# EAGLE board Orbiter_V3_1 (EAGLE 8.6.3)
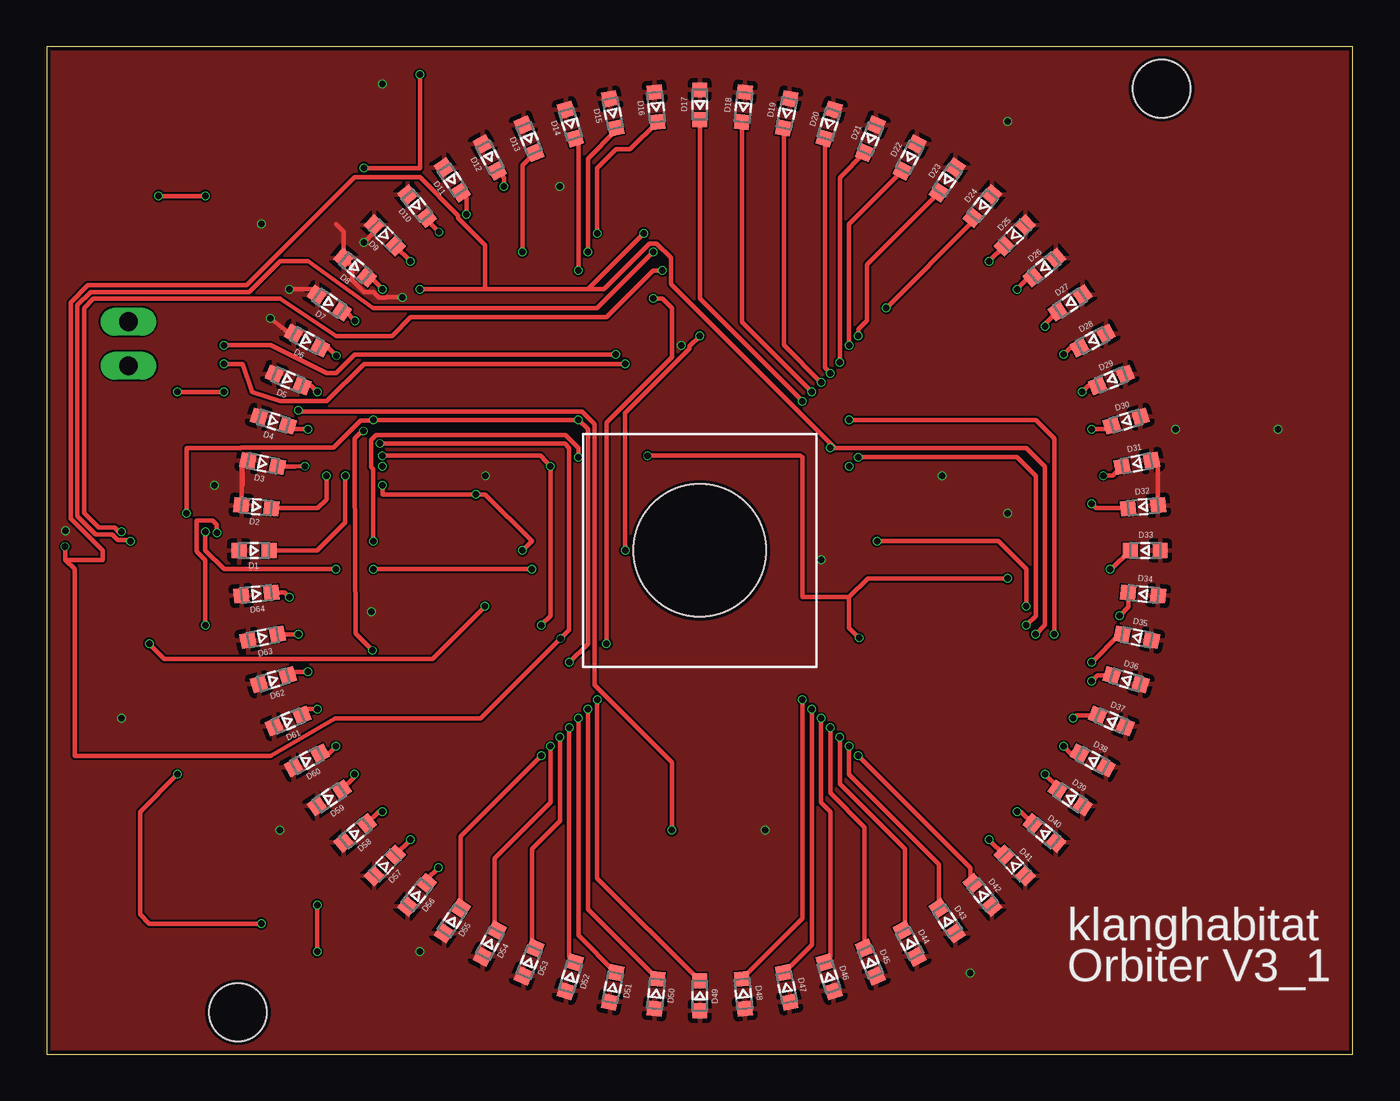
[diagram p0: board, top side]
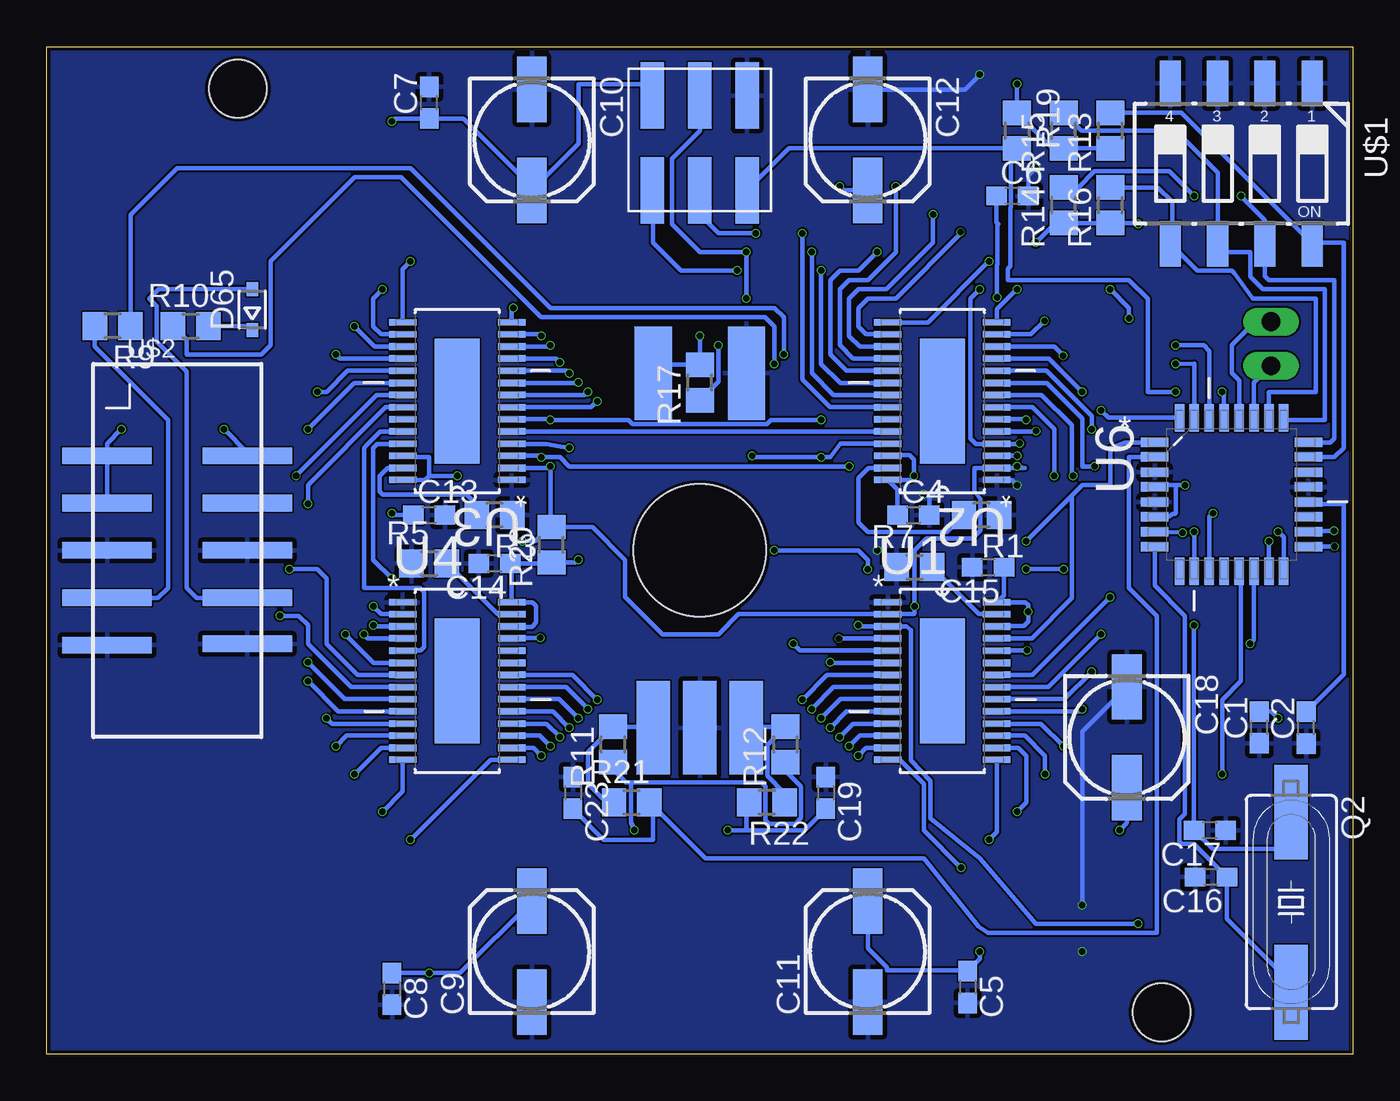
[diagram p1: board, bottom side, seen from below]

Size 70 x 54 mm. Coordinates in mm from the lower left corner, seen from the top.
Outline: 0,0 70,0 70,54 0,54 0,0
Copper layers (1*16): Top 0.035mm / dielectric 1.5mm / Bottom 0.035mm
Design rules "aisler_go_2layer": minimum track width 0.1mm, minimum drill 0.2mm, track to track 0.1mm, track to pad 0.1mm, pad to pad 0.1mm, via to via 0.1mm, smd to smd 0.1mm, copper to edge 0.2mm, drill to drill 0.21mm, minimum pad ring 0.25mm, minimum via ring 0.05mm, stop-mask expansion 0.01mm, vias tented up to drill 0mil, thermal gap 10mil
Holes 3.1 mm at 10.25,2.25 59.75,51.75

## Footprints (pad centres in the part's own frame; a part is rotated, then mirrored left to right if it is on the bottom)
THT_PIN = drill 1 long: P$1 0,0
C0603 = smd 1.1 x 1: 1 -0.85,0; 2 0.85,0
153CLV-0605 = smd 3.5 x 1.6: + 2.7,0; - -2.7,0
WL-SMCW_0603 = smd 0.8 x 0.8: 1 -0.8,0; 2 0.8,0
SOD323-R = smd 0.762 x 0.6: A 1.1,0; C -1.1,0
SM49 = smd 5.08 x 1.778: 1 -4.826,0; 2 4.826,0
R0805 = smd 1.3 x 1.5: 1 -0.95,0; 2 0.95,0
SOP65P640X120-29N = smd 1.473 x 0.356: 1 -2.921,4.216; 2 -2.921,3.581; 3 -2.921,2.921; 4 -2.921,2.286; 5 -2.921,1.626; 6 -2.921,0.965; 7 -2.921,0.33; 8 -2.921,-0.33; 9 -2.921,-0.965; 10 -2.921,-1.626; 11 -2.921,-2.286; 12 -2.921,-2.921; 13 -2.921,-3.581; 14 -2.921,-4.216; 15 2.921,-4.216; 16 2.921,-3.581; 17 2.921,-2.921; 18 2.921,-2.286; 19 2.921,-1.626; 20 2.921,-0.965; 21 2.921,-0.33; 22 2.921,0.33; 23 2.921,0.965; 24 2.921,1.626; 25 2.921,2.286; 26 2.921,2.921; 27 2.921,3.581; 28 2.921,4.216 | smd 2.4 x 6.7: THERMAL 0,0
QFP80P900X900X120-32N = smd 1.473 x 0.508: 1 -4.115,2.794; 2 -4.115,2.007; 3 -4.115,1.194; 4 -4.115,0.406; 5 -4.115,-0.406; 6 -4.115,-1.194; 7 -4.115,-2.007; 8 -4.115,-2.794; 17 4.115,-2.794; 18 4.115,-2.007; 19 4.115,-1.194; 20 4.115,-0.406; 21 4.115,0.406; 22 4.115,1.194; 23 4.115,2.007; 24 4.115,2.794 | smd 0.508 x 1.473: 9 -2.794,-4.115; 10 -2.007,-4.115; 11 -1.194,-4.115; 12 -0.406,-4.115; 13 0.406,-4.115; 14 1.194,-4.115; 15 2.007,-4.115; 16 2.794,-4.115; 25 2.794,4.115; 26 2.007,4.115; 27 1.194,4.115; 28 0.406,4.115; 29 -0.406,4.115; 30 -1.194,4.115; 31 -2.007,4.115; 32 -2.794,4.115
CTS-219-04 = smd 1.13 x 2.44: 1 -3.81,-4.3; 2 -1.27,-4.3; 3 1.27,-4.3; 4 3.81,-4.3; 5 3.81,4.3; 6 1.27,4.3; 7 -1.27,4.3; 8 -3.81,4.3
87832-10 = smd 0.89 x 4.8: 1 -5.08,-3.759; 2 -5.08,3.757; 3 -2.54,-3.759; 4 -2.54,3.757; 5 0,-3.759; 6 0,3.757; 7 2.54,-3.759; 8 2.54,3.757; 9 5.08,-3.759; 10 5,3.757
6PIN_HEADER_SMD_OPEN = smd 1.27 x 3.56: 1 -2.54,-2.7; 2 -2.54,2.38; 3 0,-2.7; 4 0,2.38; 5 2.54,-2.7; 6 2.54,2.38
BOURNS_ENCODER_SMD = smd 2 x 5 bottom: S1 -2.5,9.5; S2 2.5,9.5 | smd 1.8 x 5 bottom: TA 2.5,-9.5; TB -2.5,-9.5; VDC 0,-9.5 | hole 7.1: 0,0

## Placement (x,y rotation side)
A4  TPTHT  [THT_PIN]  4.39,36.9 180 top
A5  TPTHT  [THT_PIN]  4.38,39.26 180 top
C1  1uF  [C0603]  5.01,17.52 90 bottom
C2  100nF  [C0603]  2.5,17.5 90 bottom
C4  100n  [C0603]  23.55,28.9 0 bottom
C5  100n  [C0603]  20.65,3.6 270 bottom
C6  100n  [C0603]  18.25,46 0 bottom
C7  100n  [C0603]  49.5,51 90 bottom
C8  100n  [C0603]  51.5,3.5 270 bottom
C9  10u  [153CLV-0605]  44,5.5 90 bottom
C10  10u  [153CLV-0605]  44,49 270 bottom
C11  10u  [153CLV-0605]  26,5.5 90 bottom
C12  10u  [153CLV-0605]  26,49 270 bottom
C13  100n  [C0603]  49.5,28.9 0 bottom
C14  100n  [C0603]  46,26.3 180 bottom
C15  100n  [C0603]  19.55,26.1 180 bottom
C16  22p  [C0603]  7.59,9.5 180 bottom
C17  22p  [C0603]  7.66,12 180 bottom
C18  4,7uF/16V  [153CLV-0605]  12.11,16.98 270 bottom
C19  10nF  [C0603]  28.25,14 270 bottom
C23  10nF  [C0603]  41.8,14 270 bottom
D1  SMD_LED_0603  [WL-SMCW_0603]  11.12,27 180 top
D2  SMD_LED_0603  [WL-SMCW_0603]  11.24,29.34 174.4 top
D3  SMD_LED_0603  [WL-SMCW_0603]  11.58,31.66 168.8 top
D4  SMD_LED_0603  [WL-SMCW_0603]  12.15,33.93 163.1 top
D5  SMD_LED_0603  [WL-SMCW_0603]  12.94,36.14 157.5 top
D6  SMD_LED_0603  [WL-SMCW_0603]  13.94,38.25 151.9 top
D7  SMD_LED_0603  [WL-SMCW_0603]  15.15,40.26 146.3 top
D8  SMD_LED_0603  [WL-SMCW_0603]  16.54,42.15 140.6 top
D9  SMD_LED_0603  [WL-SMCW_0603]  18.12,43.88 135 top
D10  SMD_LED_0603  [WL-SMCW_0603]  19.85,45.46 129.4 top
D11  SMD_LED_0603  [WL-SMCW_0603]  21.74,46.85 123.8 top
D12  SMD_LED_0603  [WL-SMCW_0603]  23.75,48.06 118.2 top
D13  SMD_LED_0603  [WL-SMCW_0603]  25.86,49.06 112.5 top
D14  SMD_LED_0603  [WL-SMCW_0603]  28.07,49.85 106.9 top
D15  SMD_LED_0603  [WL-SMCW_0603]  30.34,50.42 101.3 top
D16  SMD_LED_0603  [WL-SMCW_0603]  32.66,50.76 95.6 top
D17  SMD_LED_0603  [WL-SMCW_0603]  35,50.88 90 top
D18  SMD_LED_0603  [WL-SMCW_0603]  37.34,50.76 84.4 top
D19  SMD_LED_0603  [WL-SMCW_0603]  39.66,50.42 78.8 top
D20  SMD_LED_0603  [WL-SMCW_0603]  41.93,49.85 73.1 top
D21  SMD_LED_0603  [WL-SMCW_0603]  44.14,49.06 67.5 top
D22  SMD_LED_0603  [WL-SMCW_0603]  46.25,48.06 61.9 top
D23  SMD_LED_0603  [WL-SMCW_0603]  48.26,46.85 56.3 top
D24  SMD_LED_0603  [WL-SMCW_0603]  50.15,45.46 50.6 top
D25  SMD_LED_0603  [WL-SMCW_0603]  51.88,43.88 45 top
D26  SMD_LED_0603  [WL-SMCW_0603]  53.46,42.15 39.4 top
D27  SMD_LED_0603  [WL-SMCW_0603]  54.85,40.26 33.8 top
D28  SMD_LED_0603  [WL-SMCW_0603]  56.06,38.25 28.1 top
D29  SMD_LED_0603  [WL-SMCW_0603]  57.06,36.14 22.5 top
D30  SMD_LED_0603  [WL-SMCW_0603]  57.85,33.93 16.9 top
D31  SMD_LED_0603  [WL-SMCW_0603]  58.42,31.66 11.3 top
D32  SMD_LED_0603  [WL-SMCW_0603]  58.76,29.34 5.6 top
D33  SMD_LED_0603  [WL-SMCW_0603]  58.87,27 0 top
D34  SMD_LED_0603  [WL-SMCW_0603]  58.76,24.66 354.4 top
D35  SMD_LED_0603  [WL-SMCW_0603]  58.42,22.34 348.8 top
D36  SMD_LED_0603  [WL-SMCW_0603]  57.85,20.07 343.1 top
D37  SMD_LED_0603  [WL-SMCW_0603]  57.06,17.86 337.5 top
D38  SMD_LED_0603  [WL-SMCW_0603]  56.06,15.75 331.9 top
D39  SMD_LED_0603  [WL-SMCW_0603]  54.85,13.74 326.3 top
D40  SMD_LED_0603  [WL-SMCW_0603]  53.46,11.85 320.6 top
D41  SMD_LED_0603  [WL-SMCW_0603]  51.88,10.12 315 top
D42  SMD_LED_0603  [WL-SMCW_0603]  50.15,8.54 309.4 top
D43  SMD_LED_0603  [WL-SMCW_0603]  48.26,7.15 303.8 top
D44  SMD_LED_0603  [WL-SMCW_0603]  46.25,5.94 298.1 top
D45  SMD_LED_0603  [WL-SMCW_0603]  44.14,4.94 292.5 top
D46  SMD_LED_0603  [WL-SMCW_0603]  41.93,4.15 286.9 top
D47  SMD_LED_0603  [WL-SMCW_0603]  39.66,3.58 281.3 top
D48  SMD_LED_0603  [WL-SMCW_0603]  37.34,3.24 275.6 top
D49  SMD_LED_0603  [WL-SMCW_0603]  35,3.13 270 top
D50  SMD_LED_0603  [WL-SMCW_0603]  32.66,3.24 264.4 top
D51  SMD_LED_0603  [WL-SMCW_0603]  30.34,3.58 258.8 top
D52  SMD_LED_0603  [WL-SMCW_0603]  28.07,4.15 253.1 top
D53  SMD_LED_0603  [WL-SMCW_0603]  25.86,4.94 247.5 top
D54  SMD_LED_0603  [WL-SMCW_0603]  23.75,5.94 241.9 top
D55  SMD_LED_0603  [WL-SMCW_0603]  21.74,7.15 236.3 top
D56  SMD_LED_0603  [WL-SMCW_0603]  19.85,8.54 230.6 top
D57  SMD_LED_0603  [WL-SMCW_0603]  18.12,10.12 225 top
D58  SMD_LED_0603  [WL-SMCW_0603]  16.54,11.85 219.4 top
D59  SMD_LED_0603  [WL-SMCW_0603]  15.15,13.74 213.8 top
D60  SMD_LED_0603  [WL-SMCW_0603]  13.94,15.75 208.1 top
D61  SMD_LED_0603  [WL-SMCW_0603]  12.94,17.86 202.5 top
D62  SMD_LED_0603  [WL-SMCW_0603]  12.15,20.07 196.9 top
D63  SMD_LED_0603  [WL-SMCW_0603]  11.58,22.34 191.3 top
D64  SMD_LED_0603  [WL-SMCW_0603]  11.24,24.66 185.6 top
D65  4148  [SOD323-R]  58.98,39.91 90 bottom
Q2  16MHZ  [SM49]  3.31,8.15 270 bottom
R1  2k  [R0805]  19.9,28.9 180 bottom
R3  2k  [R0805]  46,28.9 180 bottom
R5  2k  [R0805]  49.5,26.3 0 bottom
R7  2k  [R0805]  23.5,26.1 0 bottom
R9  1k  [R0805]  66.46,39.03 180 bottom
R10  1k  [R0805]  62.28,39.02 0 bottom
R11  10k  [R0805]  39.65,16.6 90 bottom
R12  10k  [R0805]  30.4,16.6 90 bottom
R13  10k  [R0805]  13,49.5 90 bottom
R14  10k  [R0805]  15.5,45.5 90 bottom
R15  10k  [R0805]  15.5,49.5 90 bottom
R16  10k  [R0805]  13,45.5 90 bottom
R17  10k  [R0805]  35,36 90 bottom
R19  10k  [R0805]  18,49.5 270 bottom
R20  10k  [R0805]  42.95,27.3 90 bottom
R21  10k  [R0805]  38.65,13.5 0 bottom
R22  10k  [R0805]  31.4,13.5 180 bottom
U1  TLC5940  [SOP65P640X120-29N]  22,20 0 bottom
U2  TLC5940  [SOP65P640X120-29N]  22,35 180 bottom
U3  TLC5940  [SOP65P640X120-29N]  48,35 180 bottom
U4  TLC5940  [SOP65P640X120-29N]  48,20 0 bottom
U6  ATMEGA328  [QFP80P900X900X120-32N]  6.5,30 0 bottom
U$1  4PIN_DIP  [CTS-219-04]  5.98,47.73 180 bottom
U$2  10PIN_HEADER_SMD  [87832-10]  63,27 270 bottom
U$3  6PIN_HEADER_SMD_OPEN  [6PIN_HEADER_SMD_OPEN]  35,49 0 bottom
U$4  BOURNS_ENCODER  [BOURNS_ENCODER_SMD]  35,27 0 top

## Library data of the parts
A4 A5 C1 C2 C4-C19 C23 D1-D65 Q2 R1 R3 R5 R7 R9-R17 R19-R22 U$1-U$4 = C_Sager_Bibliothek
U1-U4 = C_Sager_Bibliothek; MPN: TLC59401PWP; OC_FARNELL: -; OC_NEWARK: 64R0661; PACKAGE: TSSOP-28; SUPPLIER: Texas Instruments
U6 = C_Sager_Bibliothek; MPN: ATMEGA328P-AU; OC_FARNELL: 1715486; OC_NEWARK: 14R4631; PACKAGE: TQFP-32; SUPPLIER: Atmel

## Nets
A0: R13.2 U6.23 U$1.8
A1: R14.2 U6.24 U$1.7
A2: R15.2 U6.25 U$1.6
A3: R16.2 U6.26 U$1.5
A4: A4.P$1 U6.27
A5: A5.P$1 U6.28
A6: U6.19
A7: U6.22
D0/RX: R9.1 U6.30
D1/TX: R10.1 U6.31
D2/TB: C19.2 R22.2 U6.32
D3/GSCLK: U1.25 U2.25 U3.25 U4.25 U6.1
D4/TA: C23.2 R21.2 U6.2
D5: U6.9
D6/SWITCH: R17.2 U6.10 U$4.S2
D7/MODE: U1.6 U2.6 U3.6 U4.6 U6.11
D8/WS2812: U6.12
D9/XLAT: U1.3 U2.3 U3.3 U4.3 U6.13
D10/BLANK: R20.2 U1.2 U2.2 U3.2 U4.2 U6.14
D11/MOSI/SIN: U1.5 U6.15 U$3.4
D12/MISO: U6.16 U$3.1
D13/SCK: U1.4 U2.4 U3.4 U4.4 U6.17 U$3.3
GND: C1.1 C2.1 C4.2 C5.2 C6.2 C7.2 C8.2 C9.- C10.- C11.- C12.- C13.2 C14.2 C15.2 C16.2 C17.1 C18.- C19.1 C23.1 R1.1 R3.1 R5.1 R7.1 U1.1 U2.1 U3.1 U4.1 U6.3 U6.5 U6.21 U$1.1 U$1.2 U$1.3 U$1.4 U$2.5 U$2.6 U$2.9 U$2.10 U$3.6 U$4.S1 U$4.VDC
IREF_U1: R1.2 U2.27
IREF_U2: R3.2 U3.27
IREF_U3: R5.2 U4.27
IREF_U4: R7.2 U1.27
N$1: D1.1 U2.7
N$2: U1.24 U2.5
N$3: D2.1 U2.8
N$4: D8.1 U2.14
N$5: D3.1 U2.9
N$6: D9.1 U2.15
N$7: D4.1 U2.10
N$8: D10.1 U2.16
N$9: D5.1 U2.11
N$10: D6.1 U2.12
N$11: D7.1 U2.13
N$12: D11.1 U2.17
N$13: D12.1 U2.18
N$14: D13.1 U2.19
N$15: D14.1 U2.20
N$16: D15.1 U2.21
N$17: D16.1 U2.22
N$19: D17.1 U3.7
N$20: D18.1 U3.8
N$21: D19.1 U3.9
N$22: D20.1 U3.10
N$23: D21.1 U3.11
N$24: D22.1 U3.12
N$25: D23.1 U3.13
N$26: D24.1 U3.14
N$27: D25.1 U3.15
N$28: D26.1 U3.16
N$29: D27.1 U3.17
N$31: D28.1 U3.18
N$32: D29.1 U3.19
N$33: D30.1 U3.20
N$34: D31.1 U3.21
N$35: D32.1 U3.22
N$39: D33.1 U4.7
N$40: D34.1 U4.8
N$41: D35.1 U4.9
N$42: D36.1 U4.10
N$43: D37.1 U4.11
N$44: D38.1 U4.12
N$45: D39.1 U4.13
N$46: D40.1 U4.14
N$47: D41.1 U4.15
N$48: D42.1 U4.16
N$49: D43.1 U4.17
N$50: D44.1 U4.18
N$51: D45.1 U4.19
N$52: D46.1 U4.20
N$53: D47.1 U4.21
N$54: D48.1 U4.22
N$58: D49.1 U1.7
N$59: D50.1 U1.8
N$60: D51.1 U1.9
N$61: D52.1 U1.10
N$62: D53.1 U1.11
N$63: D54.1 U1.12
N$64: D55.1 U1.13
N$65: D56.1 U1.14
N$66: D57.1 U1.15
N$67: D58.1 U1.16
N$68: D59.1 U1.17
N$69: D60.1 U1.18
N$70: D61.1 U1.19
N$71: D62.1 U1.20
N$72: D63.1 U1.21
N$73: D64.1 U1.22
N$77: D65.C R10.2
N$81: C17.2 Q2.1 U6.7
N$82: C16.1 Q2.2 U6.8
N$90: C2.2 U6.20
RESET: R19.2 U6.29 U$3.5
RX: R9.2 U$2.7
SIN_U2: U2.24 U3.5
SIN_U3: U3.24 U4.5
TA: R11.2 R21.1 U$4.TA
TB: R12.2 R22.1 U$4.TB
TX: D65.A U$2.8
VCC: C1.2 C4.1 C5.1 C6.1 C7.1 C8.1 C9.+ C10.+ C11.+ C12.+ C13.1 C14.1 C15.1 C18.+ D1.2 D2.2 D3.2 D4.2 D5.2 D6.2 D7.2 D8.2 D9.2 D10.2 D11.2 D12.2 D13.2 D14.2 D15.2 D16.2 D17.2 D18.2 D19.2 D20.2 D21.2 D22.2 D23.2 D24.2 D25.2 D26.2 D27.2 D28.2 D29.2 D30.2 D31.2 D32.2 D33.2 D34.2 D35.2 D36.2 D37.2 D38.2 D39.2 D40.2 D41.2 D42.2 D43.2 D44.2 D45.2 D46.2 D47.2 D48.2 D49.2 D50.2 D51.2 D52.2 D53.2 D54.2 D55.2 D56.2 D57.2 D58.2 D59.2 D60.2 D61.2 D62.2 D63.2 D64.2 R11.1 R12.1 R13.1 R14.1 R15.1 R16.1 R17.1 R19.1 R20.1 U1.26 U1.28 U2.26 U2.28 U3.26 U3.28 U4.26 U4.28 U6.4 U6.6 U6.18 U$2.1 U$2.2 U$2.3 U$3.2

## Tracks (layer width: path | path; a pad name or v marks a point on that pad's centre or on a via)
A0
  Bottom 0.254: U6.23 0.99,32.01 0.5,32.5 0.5,43.5 2.1,43.5 U$1.8 9.19,50.45 R13.2
A1  (via drill 0.35)
  Top 0.254: v8.5,46 v6,46
  Bottom 0.254: U6.24 1.21,32.79 1,33 1,41.5 4.5,41.5 4.71,41.71 U$1.7 4.71,44.71 v6,46 | R14.2 14.72,46.45 13.84,47.33 9.83,47.33 v8.5,46
A2
  Bottom 0.254: U6.25 3.6,34 1.5,34 1.5,41 4.82,41 5.5,41.68 5.5,42.11 5.5,42.12 5.5,43 6.82,43 U$1.6 7.25,47.25 9.5,49.5 14.55,49.5 R15.2
A3
  Bottom 0.254: R16.2 10.45,46.45 9.68,45.68 9.68,43.32 U$1.5 8.34,41.98 6.59,41.98 6.57,42 6.5,42 6.36,41.86 5.36,40.5 2,40.5 2,35.5 4.5,35.5 4.49,35.49 U6.26
A4
  Bottom 0.254: U6.27 5.31,35.98 A4.P$1
A5
  Bottom 0.254: U6.28 6.09,36.09 6.5,36.5 6.5,38 5.24,39.26 A5.P$1
D0/RX  (via drill 0.35)
  Top 0.254: v9.5,38 12,38 15,36.5 15.5,36.5 16.5,37.5 v30.5,37.5
  Bottom 0.254: v30.5,37.5 30.5,39.5 31,40 43,40 50.5,47.5 63,47.5 65.5,45 65.5,39.05 R9.1 | U6.30 7.69,37.69 8,38 v9.5,38
D1/TX  (via drill 0.35)
  Top 0.254: v31,37 17,37 15,35 12.5,35 11,35.5 10.5,37 v9.5,37
  Bottom 0.254: U6.31 8.51,37.01 v9.5,37 | v31,37 31,39 31.5,39.5 43.5,39.5 51,47 53.5,47 58,42.5 58,38 58.5,37.5 62.5,37.5 62.5,38.3 R10.1
D2/TB  (via drill 0.35)
  Top 0.254: v33.5,12 33.5,15.64 29.35,19.79 29.35,33.78 28.69,34.45 13.55,34.45 v13.5,34.5
  Bottom 0.254: C19.2 29.4,12 32.5,12 | 32.5,12 32.5,13.35 R22.2 | U6.32 13.12,34.12 v13.5,34.5 | v33.5,12 32.5,12
D3/GSCLK  (via drill 0.35)
  Top 0.254: v51.5,25.5 44,25.5 43,24.5 | v43.54,22.31 43,22.85 43,24.5 | v32.2,32.08 40.38,32.08 40.5,32 40.5,24.5 43,24.5 | v17.5,27.5 17.5,31.36 17.4,31.46 17.4,32.92 17.66,33.18 27.82,33.18 28.35,32.65 28.5,32.5 v28.5,32
  Bottom 0.254: U3.25 52.29,32.71 52.5,32.5 52.5,26.5 v51.5,25.5 | v43.54,22.31 45.05,22.31 U4.25 | U6.1 12.21,32.79 13,32.5 13,30.5 14.5,30.5 15.05,29.95 | U1.25 17.21,22.29 15.05,24.45 15.05,29.95 | U2.25 25.09,32.72 27.46,32.72 28,32 v28.5,32 32.12,32 v32.2,32.08 | 15.05,29.95 v17.5,27.5
D4/TA
  Bottom 0.254: C23.2 40.15,11.5 37.5,11.5 37.5,13.3 | 37.5,13.3 R21.2 | 37.5,13.3 34.7,10.5 23,10.5 20.08,6.85 19.55,6.5 10.5,6.5 10.5,23.5 12,25 12,32 10.62,32 U6.2
D6/SWITCH  (via drill 0.35)
  Top 0.254: v35,38.5 34.45,37.95 34.45,37.81 31,34.36 v31,27 | v26,26 v17.5,26 | v15.5,26 9.5,26 8.5,27 v8.5,28
  Bottom 0.254: U$4.S2 37.05,36.95 R17.2 v35,38.5 | v31,27 26.5,27 26,26.5 v26,26 | v17.5,26 v15.5,26 | v8.5,28 v8.51,27.99 U6.10
D7/MODE  (via drill 0.35)
  Top 0.254: v28,21 29,22 29,33.5 v28.5,34 v17.5,34 17.45,33.95 16.81,33.95 15.39,32.53 10.42,32.53 10.39,32.5 7.5,32.5 v7.5,29 | v43,34 53,34 54,33 v54,22.5
  Bottom 0.254: U2.6 17.54,34.03 v17.5,34 | v28,21 27.96,20.96 U1.6 | U3.6 43.03,34.03 v43,34 38.82,34 38.59,33.77 31.41,33.77 31.18,34 v28.5,34 | v54,22.5 52.47,20.96 U4.6 | v7.5,29 7.69,28.81 U6.11
D9/XLAT  (via drill 0.35)
  Top 0.254: v17.98,32.08 26.48,32.08 v27,31.5 27,23.5 v26.5,23 | v43.5,32 52,32 53,31 53,23.5 v52.5,23 | v11.5,7 5.5,7 5,7.5 5,13 v7,15
  Bottom 0.254: U2.3 18.08,32.08 v17.98,32.08 | v26.5,23 26.43,22.93 U1.3 23.92,22.92 23.69,22.74 23.69,15.74 22.65,14.65 22.65,12.65 20,10.5 17,7 v11.5,7 | U3.3 43.58,32.08 v43.5,32 42.5,32 42,31.5 v27,31.5 | v52.5,23 52.42,22.92 U4.3 | v7,15 7,19 6,20 6,25.79 U6.13
D10/BLANK  (via drill 0.35)
  Top 0.254: v52.5,24 52.5,26 51,27.5 v44.5,27.5 | v23.5,24 20.69,21.19 11,21.19 10.66,21.19 6.31,21.19 v5.5,22 | v23.5,24 | v23.5,24 v23.49,24
  Bottom 0.254: v18,31.5 17.58,31.42 U2.2 19.29,31.42 19.89,31.42 20.29,31.41 20.29,30.17 19.97,29.74 19.97,28.06 20.38,27.65 22.85,27.65 23.5,27 v23.49,24 23.49,23.62 23.54,23.58 U1.2 32.92,23.58 34,22.5 37,22.5 39,24.5 39,26.5 40.75,28.25 R20.2 43,28.3 | U3.2 43.08,31.42 v43,31.5 43,28.3 | U4.2 52.08,23.58 v52.5,24 | v44.5,27.5 43.8,27.5 43,28.3 | U6.14 5.31,22.19 v5.5,22
D11/MOSI/SIN  (via drill 0.35)
  Top 0.254: v32.5,43 29.5,40 17.5,40 14,42.5 12.5,42.5 10.85,40.85 4,40.85 3.85,40.85 2.35,40.85 1.65,40.15 1.65,28.85 2.64,27.86 3.5,27.86 3.81,27.55 4.45,27.55 v4.5,27.5 | v30,22 30,33.86 33.5,37.36 33.5,40 33,40.5 v32.5,40.5
  Bottom 0.254: U$3.4 35,49.5 36.5,48 36.5,44.5 35,43 v32.5,43 v32.5,40.5 | v4.5,27.5 U6.15 | U1.5 29.63,21.63 v30,22
D12/MISO  (via drill 0.35)
  Top 0.254: v33,42 32.5,42 30,39.5 19.5,39.5 18.5,38.5 15.5,38.5 12.5,40.5 2.5,40.5 2,40 2,29 2.79,28.21 3.65,28.21 3.86,28 v4,28
  Bottom 0.254: U$3.1 37.5,46.26 37.5,43.5 36,42 v33,42 | v4,28 3.71,27.71 U6.16
D13/SCK  (via drill 0.35)
  Top 0.254: v32,44 29,41 | 29,41 23.5,41 | 23.5,41 v20,41 | v53,22.5 53.5,23 53.5,31.5 52.5,32.5 v42,32.5 42.23,32.5 33.45,41.28 33.45,42.69 32.69,43.45 32.31,43.45 29.86,41 29,41 | v17.85,32.73 27.77,32.73 28,32.5 28,22.74 v27.54,22.28 23.26,18 15.47,18 12,16 1.5,16 1.5,26 1,26.5 | 1,26.5 3,26.5 3,27 1.29,28.71 1.29,40.29 2.21,41.21 10.71,41.21 16.5,47 20,47 22.05,44.95 22.05,44.81 23.5,43.36 23.5,41 | 1,26.5 v0.99,27.21
  Bottom 0.254: U$3.3 35,45 34,44 v32,44 | v0.99,27.21 1.29,27.21 U6.17 | v17.85,32.73 17.79,32.71 U2.4 20.21,32.71 20.5,33 20.5,40.5 v20,41 | v27.54,22.28 U1.4 | U3.4 43.21,32.71 v42,32.5 | v53,22.5 52.79,22.29 U4.4
GND  (via drill 0.35)
  Top 0.254: v25.5,27 26,27.5 23.5,30 v23,30 18,30 v18,30.5 | v14.5,8 v14.5,5.5 | v17,47.5 20,47.5 v20,52.5
  Bottom 0.254: C4.2 22.7,29.8 22.5,30 v23,30 | U2.1 18.28,30.78 v18,30.5 | C18.- 14.5,17.29 v14.5,8 | C6.2 17.4,47.1 v17,47.5 | v20,52.5 20.8,51.7 C12.-
  pour Bottom: -0.5,57.5 -0.5,-3.5 71,-3.5 71,57.5
IREF_U1
  Bottom 0.254: R1.2 21.75,28 26,28 26.5,28.5 26.5,30.89 25.97,31.42 U2.27
IREF_U2
  Bottom 0.254: U3.27 51.73,31.42 52.15,31 52.15,30.15 52,30 47.5,30 46.95,29.45 R3.2
IREF_U3
  Bottom 0.254: U4.27 45.83,23.58 R5.2
IREF_U4
  Bottom 0.254: R7.2 20.03,23.58 U1.27
N$1  (via drill 0.35)
  Top 0.254: v16,31 16,28.5 14.5,27 D1.1
  Bottom 0.254: U2.7 17.17,34.67 16,33.5 v16,31
N$2  (via drill 0.35)
  Top 0.254: 16.51,31.76 16.51,31.5 | 16.51,31.5 16.55,22.55 v17.46,21.64 | v16.98,33.4 16.9,33.4 16.5,33 16.51,32.99 16.51,31.5
  Bottom 0.254: U2.5 17.13,33.37 v16.98,33.4 | v17.46,21.64 17.47,21.63 U1.24
N$3  (via drill 0.35)
  Top 0.254: v15,31 15,29.73 14.53,29.26 D2.1
  Bottom 0.254: U2.8 16.68,35.33 15.07,33.72 15.07,31.07 v15,31
N$4  (via drill 0.35)
  Top 0.254: v18,41 17.36,41.64 D8.1
  Bottom 0.254: U2.14 19.08,39.92 v18,41
N$5  (via drill 0.35)
  Top 0.254: v13.83,31.52 13.31,31.5 D3.1
  Bottom 0.254: U2.9 16.41,35.97 14.5,34.06 14.5,31.5 13.85,31.5 v13.83,31.52
N$6  (via drill 0.35)
  Top 0.254: v19.5,42.5 D9.1 | D9.1
  Bottom 0.254: U2.15 22.78,39.22 v19.5,42.5
N$7  (via drill 0.35)
  Top 0.254: v14,33.5 13.11,33.5 D4.1
  Bottom 0.254: U2.10 16.44,36.63 14,34.19 v14,33.5
N$8  (via drill 0.35)
  Top 0.254: v21.03,44.06 20.36,44.73 D10.1
  Bottom 0.254: U2.16 26.08,38.58 26.5,39 26.5,40 26,40.5 24.5,40.5 21.03,43.97 v21.03,44.06
N$9  (via drill 0.35)
  Top 0.254: v14.5,35.5 14.17,35.83 D5.1
  Bottom 0.254: U2.11 16.29,37.29 v14.5,35.5
N$10  (via drill 0.35)
  Top 0.254: v15.52,37.44 15.09,37.87 D6.1
  Bottom 0.254: U2.12 16,37.92 v15.52,37.44
N$11  (via drill 0.35)
  Top 0.254: v16.53,39.3 16.01,39.82 D7.1
  Bottom 0.254: U2.13 17.25,38.58 v16.53,39.3
N$12  (via drill 0.35)
  Top 0.254: v22.5,45 22.5,45.87 D11.1
  Bottom 0.254: U2.17 26.42,37.92 27,38.5 27,40.5 26.5,41 25,41 22.5,43.5 v22.5,45
N$13  (via drill 0.35)
  Top 0.254: v24.5,46.5 24.5,46.98 D12.1
  Bottom 0.254: U2.18 26.79,37.29 27.5,38 27.5,41 27,41.5 26,41.5 24.5,43 v24.5,46.5
N$14  (via drill 0.35)
  Top 0.254: v25.5,43 25.5,47.66 D13.1
  Bottom 0.254: U2.19 27.13,36.63 28,37.5 28,41.5 27.5,42 26.5,42 v25.5,43
N$15  (via drill 0.35)
  Top 0.254: v28.5,42 28.5,48.89 D14.1
  Bottom 0.254: U2.20 27.46,35.97 28.5,37 v28.5,42
N$16  (via drill 0.35)
  Top 0.254: D15.1 30.5,49.5 29,48 v29,43
  Bottom 0.254: U2.21 27.83,35.33 29,36.5 v29,43
N$17  (via drill 0.35)
  Top 0.254: D16.1 31.27,48.5 30.5,48.5 29.5,47.5 v29.5,44
  Bottom 0.254: v29.5,44 29.5,37.5 29.5,36.15 28.02,34.67 U2.22 | U2.22
N$19  (via drill 0.35)
  Top 0.254: v40.5,35 35,40.5 D17.1
  Bottom 0.254: U3.7 40.83,34.67 v40.5,35
N$20  (via drill 0.35)
  Top 0.254: v41,35.5 37.26,39.24 D18.1
  Bottom 0.254: U3.8 41.17,35.33 v41,35.5
N$21  (via drill 0.35)
  Top 0.254: v41.5,36 39.51,37.99 D19.1
  Bottom 0.254: U3.9 41.53,35.97 v41.5,36
N$22  (via drill 0.35)
  Top 0.254: v42,36.5 41.7,36.8 D20.1
  Bottom 0.254: U3.10 42.13,36.63 v42,36.5
N$23  (via drill 0.35)
  Top 0.254: v42.5,37.08 42.5,46.99 D21.1
  Bottom 0.254: U3.11 42.71,37.29 v42.5,37.08
N$24  (via drill 0.35)
  Top 0.254: v43,38 43,44.48 D22.1
  Bottom 0.254: U3.12 43.08,37.92 v43,38
N$25  (via drill 0.35)
  Top 0.254: v43.5,38.5 43.5,38.86 43.95,39.31 43.95,42.32 D23.1
  Bottom 0.254: U3.13 43.58,38.58 v43.5,38.5
N$26  (via drill 0.35)
  Top 0.254: v45,40 49.64,44.64 D24.1
  Bottom 0.254: U3.14 45.08,39.92 v45,40
N$27  (via drill 0.35)
  Top 0.254: v50.5,42.5 D25.1
  Bottom 0.254: U3.15 50.92,42.08 v50.5,42.5
N$28  (via drill 0.35)
  Top 0.254: v52,41 52.64,41.64 D26.1
  Bottom 0.254: 51.58,38.58 U3.16 52.08,38.58 52.5,39 52.5,40.5 v52,41
N$29  (via drill 0.35)
  Top 0.254: v53.5,39 53.5,39.13 D27.1
  Bottom 0.254: U3.17 52.42,37.92 v53.5,39
N$31  (via drill 0.35)
  Top 0.254: v54.5,37.5 54.87,37.87 D28.1
  Bottom 0.254: U3.18 54.29,37.29 v54.5,37.5
N$32  (via drill 0.35)
  Top 0.254: v55.5,35.5 55.83,35.83 D29.1
  Bottom 0.254: U3.19 53.87,36.63 55,35.5 v55.5,35.5
N$33  (via drill 0.35)
  Top 0.254: v56,33.5 56.89,33.5 D30.1
  Bottom 0.254: U3.20 53.53,35.97 v56,33.5
N$34  (via drill 0.35)
  Top 0.254: v56.63,31.01 57.14,31.01 D31.1
  Bottom 0.254: U3.21 52.31,35.33 v56.63,31.01
N$35  (via drill 0.35)
  Top 0.254: v56,29.5 56.24,29.26 D32.1
  Bottom 0.254: U3.22 51.83,34.67 56,30.5 v56,29.5
N$39  (via drill 0.35)
  Top 0.254: v57,26 57.07,26 D33.1
  Bottom 0.254: U4.7 53.33,20.33 55,22 55,25.5 55.5,26 v57,26
N$40  (via drill 0.35)
  Top 0.254: v57.5,23.5 57.96,23.96 D34.1
  Bottom 0.254: U4.8 53.67,19.67 56,22 56,23 56.5,23.5 v57.5,23.5
N$41  (via drill 0.35)
  Top 0.254: v56,21 57.49,22.5 D35.1
  Bottom 0.254: U4.9 54.03,19.04 v56,21
N$42  (via drill 0.35)
  Top 0.254: v56,20 56.3,20.3 D36.1
  Bottom 0.254: U4.10 54.37,18.37 v56,20
N$43  (via drill 0.35)
  Top 0.254: v55,18 55.17,18.17 D37.1
  Bottom 0.254: U4.11 54.71,17.71 v55,18
N$44  (via drill 0.35)
  Top 0.254: v54.5,16.5 54.87,16.13 D38.1
  Bottom 0.254: U4.12 53.92,17.08 v54.5,16.5
N$45  (via drill 0.35)
  Top 0.254: v53.5,15 54.18,14.32 D39.1
  Bottom 0.254: U4.13 52.08,16.42 v53.5,15
N$46  (via drill 0.35)
  Top 0.254: v52,13 52.2,13 D40.1
  Bottom 0.254: U4.14 50.92,14.08 v52,13
N$47  (via drill 0.35)
  Top 0.254: v50.5,11.5 D41.1 | D41.1
  Bottom 0.254: U4.15 46.22,15.78 v50.5,11.5
N$48  (via drill 0.35)
  Top 0.254: v43.5,16 49.5,10 49.5,9.3 D42.1
  Bottom 0.254: U4.16 43.92,16.42 v43.5,16
N$49  (via drill 0.35)
  Top 0.254: v43,16.5 43,15 47.81,10.19 D43.1
  Bottom 0.254: U4.17 43.58,17.08 v43,16.5
N$50  (via drill 0.35)
  Top 0.254: v42.5,17 42.5,14.5 46,11 46,6.77 D44.1
  Bottom 0.254: U4.18 43.21,17.71 v42.5,17
N$51  (via drill 0.35)
  Top 0.254: v42,17.5 42,14 43.83,12.17 D45.1
  Bottom 0.254: U4.19 42.87,18.37 v42,17.5
N$52  (via drill 0.35)
  Top 0.254: v41.5,18 41.5,13.5 42,13 42,5.22 D46.1
  Bottom 0.254: U4.20 42.53,19.04 v41.5,18
N$53  (via drill 0.35)
  Top 0.254: v41,18.5 41,5.86 D47.1
  Bottom 0.254: U4.21 42.17,19.67 v41,18.5
N$54  (via drill 0.35)
  Top 0.254: v40.5,19 40.5,7.27 D48.1
  Bottom 0.254: U4.22 41.83,20.33 v40.5,19
N$58  (via drill 0.35)
  Top 0.254: v29.5,19 29.5,9.43 D49.1
  Bottom 0.254: U1.7 28.17,20.33 v29.5,19
N$59  (via drill 0.35)
  Top 0.254: v29,18.5 29,7.77 D50.1
  Bottom 0.254: U1.8 27.83,19.67 v29,18.5
N$60  (via drill 0.35)
  Top 0.254: v28.5,18 28.5,6.36 D51.1
  Bottom 0.254: U1.9 27.46,19.04 v28.5,18
N$61  (via drill 0.35)
  Top 0.254: D52.1 28,5.22 v28,17.5
  Bottom 0.254: U1.10 27.13,18.37 v28,17.5
N$62  (via drill 0.35)
  Top 0.254: v27.5,17 27.5,12.5 26,11 26,5.84 D53.1
  Bottom 0.254: U1.11 26.79,17.71 v27.5,17
N$63  (via drill 0.35)
  Top 0.254: v27,16.5 27,13.5 24,10.5 24,6.77 D54.1
  Bottom 0.254: U1.12 26.42,17.08 v27,16.5
N$64  (via drill 0.35)
  Top 0.254: v26.5,16 22.18,11.68 D55.1
  Bottom 0.254: U1.13 26.08,16.42 v26.5,16
N$65  (via drill 0.35)
  Top 0.254: v21,10 20.36,9.36 D56.1
  Bottom 0.254: U1.14 24.28,15.78 24,15.5 23,14.5 23,12 v21,10
N$66  (via drill 0.35)
  Top 0.254: v19.5,11.5 D57.1
  Bottom 0.254: U1.15 19.08,11.92 v19.5,11.5
N$67  (via drill 0.35)
  Top 0.254: v18,13 17.8,13 D58.1
  Bottom 0.254: U1.16 17.92,16.42 17.5,16 17.5,13.5 v18,13
N$68  (via drill 0.35)
  Top 0.254: v16.5,15 16.5,14.87 D59.1
  Bottom 0.254: U1.17 17.58,17.08 16.5,16 v16.5,15
N$69  (via drill 0.35)
  Top 0.254: v15.5,16.5 15.13,16.13 D60.1
  Bottom 0.254: U1.18 16.71,17.71 v15.5,16.5
N$70  (via drill 0.35)
  Top 0.254: v14.5,18.5 14.01,18.5 D61.1
  Bottom 0.254: U1.19 14.63,18.37 v14.5,18.5
N$71  (via drill 0.35)
  Top 0.254: v14,20.5 13.11,20.5 D62.1
  Bottom 0.254: U1.20 15.46,19.04 v14,20.5
N$72  (via drill 0.35)
  Top 0.254: v13.5,22.5 D63.1
  Bottom 0.254: U1.21 16.33,19.67 v13.5,22.5
N$73  (via drill 0.35)
  Top 0.254: v13,24.5 12.76,24.74 D64.1
  Bottom 0.254: U1.22 17.17,20.33 v13,24.5
N$77
  Bottom 0.254: R10.2 59.19,39.02 D65.C
N$81  (via drill 0.35)
  Top 0.254: v8.5,23 8.5,26.5 8.05,26.95 8.05,28.19 8.05,28.61 8.89,28.61 9.12,28.38 v9.12,27.95
  Bottom 0.254: Q2.1 3,12.67 3,11 7.51,11 C17.2 8.51,22.99 v8.5,23 | v9.12,27.95 U6.7
N$82
  Bottom 0.254: U6.8 10.62,25.11 9,23.5 9,12.88 9.29,12.59 9.29,11.41 9.16,11.27 8.52,11.27 C16.1 6.74,7.24 4.5,5 3.5,4 3.31,3.81 Q2.2
N$90
  Bottom 0.254: C2.2 0.5,20.35 0.5,29.5 2.29,29.5 U6.20
RESET  (via drill 0.35)
  Top 0.254: v9.5,35.5 v7,35.5
  Bottom 0.254: U$3.5 30.21,48.55 R19.2 18.32,48.23 18.32,45.41 18.35,45.38 18.35,42.24 18.5,42.09 18.5,41.5 12,41.5 11,40.5 11,35.5 v9.5,35.5 | 7,34.21 U6.29 6.91,35.41 v7,35.5
RX
  Bottom 0.254: U$2.7 64.04,24.46 63.5,25 63.5,34 67.41,37.91 R9.2
SIN_U2
  Bottom 0.254: U2.24 U3.5
SIN_U3
  Bottom 0.254: U3.24 52.13,33.37 52.85,32.65 53,32.5 53,25 50,25 49.76,24.76 49.76,21.83 49.96,21.63 U4.5
TA
  Bottom 0.254: U$4.TA 37.55,17.55 R11.2 41,16.2 41,14.5 40,13.5 R21.1
TB
  Bottom 0.254: R22.1 30.45,13.98 31.38,14.91 31.38,16.57 R12.2 32.45,17.55 U$4.TB
TX
  Bottom 0.254: D65.A 63.99,41.01 64.5,40.5 64.11,40.11 64.11,38.18 62.5,36.57 62.5,25 61.96,24.46 U$2.8
VCC  (via drill 0.35)
  Top 0.254: D31.2 59.56,31.46 D32.2 | D7.2 14.19,41 v13,41 | v12,39.43 12.62,38.95 13.07,38.58 D6.2 | v19.07,40.57 18.21,40.57 18.19,40.55 17.81,40.55 17.52,40.84 17.01,40.84 16.36,41.49 16.36,42.22 D8.2 15.92,44.08 15.5,44.5 | v1,28.05 1,28 | 10.5,30.5 10.5,31.52 D3.2 10.44,31.46 D2.2 | v17,43.5 17.55,44.05 D9.2
  Bottom 0.254: U2.26 24.89,32.11 23.76,32.11 23.52,31.87 v23.52,31 23.52,30.94 23.68,30.78 U2.28 24.4,30.26 C4.1 | R14.1 R16.1 11.55,44.55 v11.5,44.5 | R13.1 R15.1 16.1,48.55 R19.1 v18,52 | C12.+ 27.3,46.3 v27.5,46.5 | C10.+ 43.9,46.4 | 43.9,46.4 41.5,48.8 41.5,52 38.16,52 U$3.2 | 43.9,46.4 47.65,50.15 C7.1 51.35,50.15 v51.5,50 | C18.+ 12.11,12.39 v12.5,12 | C1.2 4.37,18.37 v4,18 | v20,5.5 20,5.1 C5.1 20.7,4.5 24.97,4.5 24.97,4.64 26,5.67 C11.+ | C9.+ 47.85,4.35 v49.5,4.35 C8.1 | R11.1 39.65,15.27 38.94,14.56 | v38.5,12 38.67,12.43 38.67,14.55 38.94,14.56 | 38.94,14.56 31.62,14.56 31.62,14.49 31.47,14.34 31.47,12.54 31.29,12.35 29.88,12.35 29.57,12.66 29.57,14.34 30.4,15.17 R12.1 | U$2.3 U$2.1 66.76,32.74 v66,33.5 | U3.26 50.84,32 49.5,32 49.5,31 | 49.5,31 49.72,30.78 U3.28 | 49.5,31 v48,31 | C13.1 51.4,28.9 v51.5,29 | U4.26 45.07,22.91 44,22.91 43.77,23.14 43.77,24.02 43.97,24.22 U4.28 45.08,26.23 C14.1 43,26.3 R20.1 41.65,26.35 v41.5,26.5 | U$2.2 59.24,32.24 v60.5,33.5 | U1.26 19.05,22.95 17.64,22.95 17.4,23.19 v17.4,23.72 17.4,24.07 17.55,24.22 U1.28 18.7,24.59 C15.1 | v13,41 12,40 v12,39.43 | R17.1 34,36.05 v34,38 | R14.1 15.5,44.03 | 10.71,30.5 U6.4 10.52,30.5 9.5,30.5 | v19.07,40.57 19.07,42.29 19.05,42.31 19.05,44.45 19,44.5 19.1,44.6 C6.1 | U6.18 2.33,28.05 v1,28.05 | 9.5,30.5 v9,30.5 | 9.5,30.5 9.5,29 9.55,28.95 9.69,28.95 9.83,28.81 U6.6 | R14.1 15.95,44.55 v17,43.5
  pour Top: -2,58 -1.5,-4.5 72.5,-4.5 72,58

## Text on the board
tNames: klanghabitat | Orbiter V3_1